# EAGLE board AVR-Burner (EAGLE 6.1)
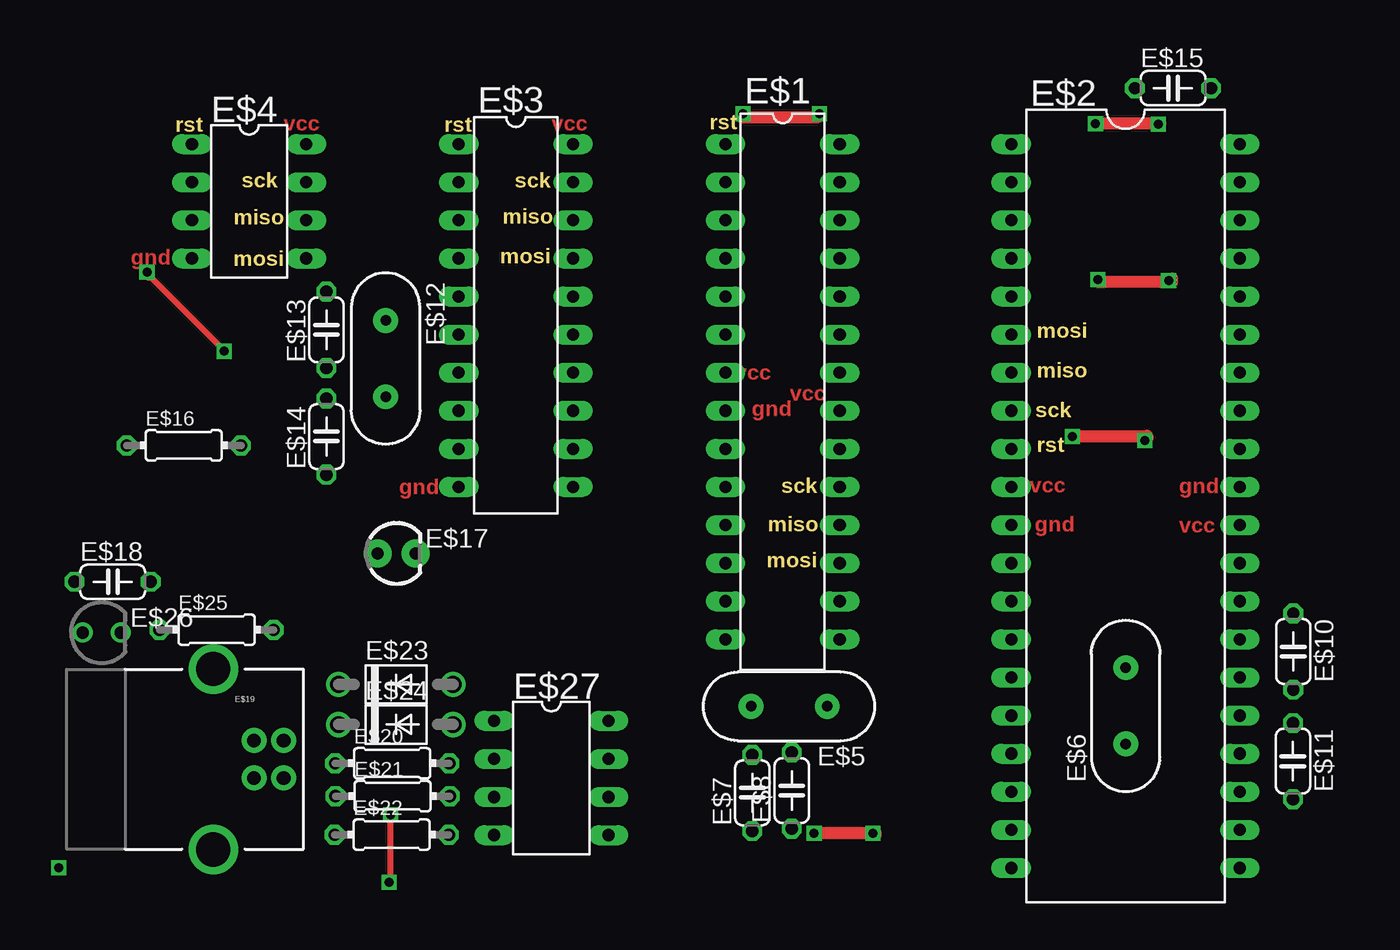
[diagram p0: board, top side]
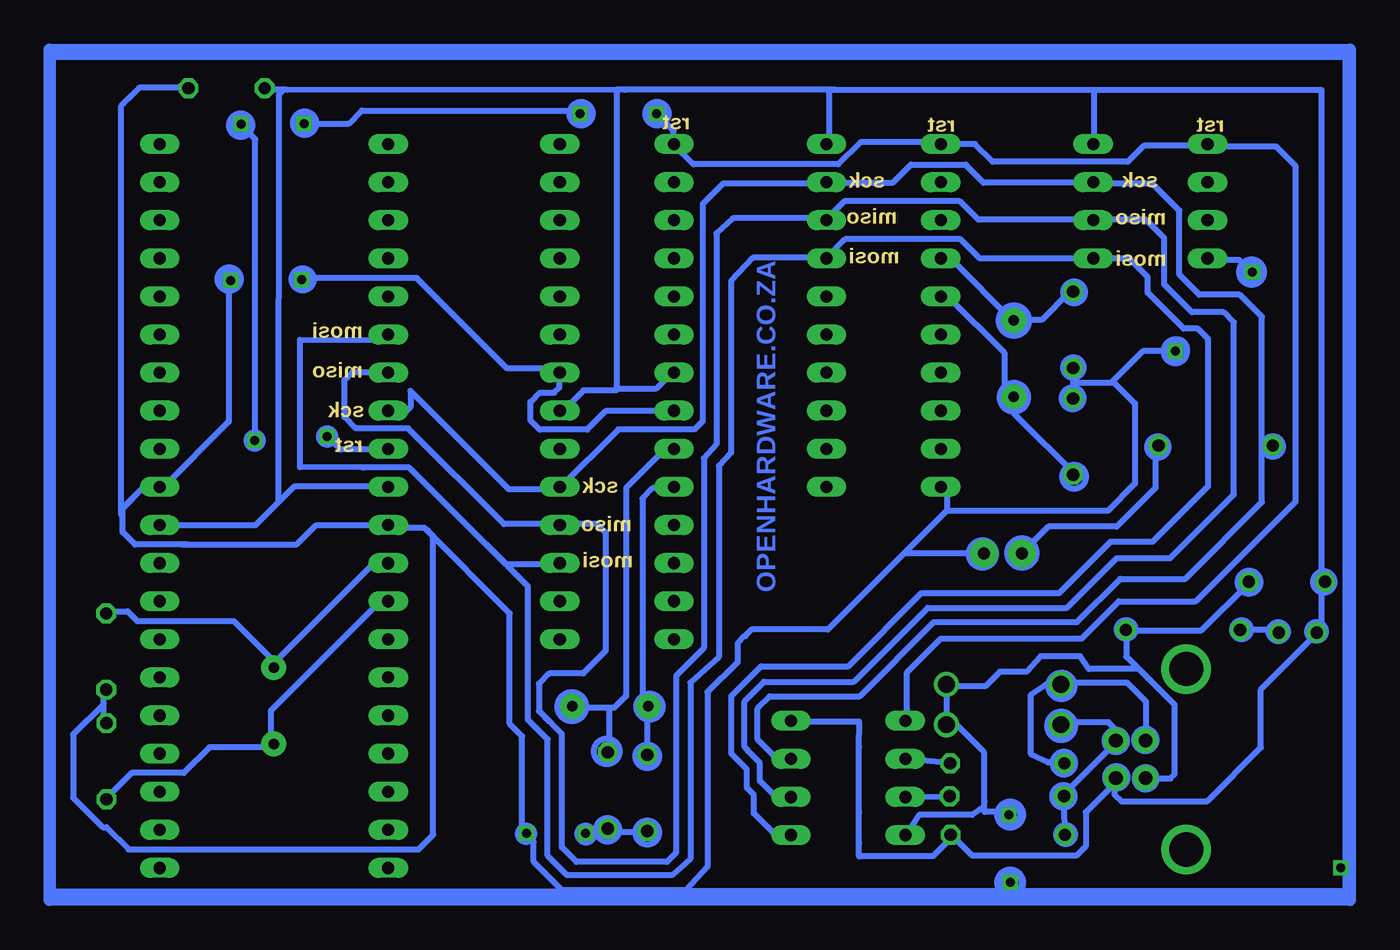
[diagram p1: board, bottom side, seen from below]

No outline drawn. Coordinates in mm, seen from the top.
Copper layers (1*16): Top 0.035mm / dielectric 1.5mm / Bottom 0.035mm
Design rules: minimum track width 10mil, minimum drill 24mil, track to track 8mil, track to pad 8mil, pad to pad 8mil, via to via 8mil, smd to smd 8mil, copper to edge 40mil, drill to drill 8mil, minimum pad ring 10mil, minimum via ring 8mil, stop-mask expansion 4mil, vias tented up to drill 0mil, thermal gap 10mil

## Footprints (pad centres in the part's own frame; a part is rotated, then mirrored left to right if it is on the bottom)
DIL28-3 = drill 0.813 long: 1 -16.51,-3.81; 2 -13.97,-3.81; 3 -11.43,-3.81; 4 -8.89,-3.81; 5 -6.35,-3.81; 6 -3.81,-3.81; 7 -1.27,-3.81; 8 1.27,-3.81; 9 3.81,-3.81; 10 6.35,-3.81; 11 8.89,-3.81; 12 11.43,-3.81; 13 13.97,-3.81; 14 16.51,-3.81; 15 16.51,3.81; 16 13.97,3.81; 17 11.43,3.81; 18 8.89,3.81; 19 6.35,3.81; 20 3.81,3.81; 21 1.27,3.81; 22 -1.27,3.81; 23 -3.81,3.81; 24 -6.35,3.81; 25 -8.89,3.81; 26 -11.43,3.81; 27 -13.97,3.81; 28 -16.51,3.81
DIL40 = drill 0.813 long: 1 -24.13,-7.62; 2 -21.59,-7.62; 3 -19.05,-7.62; 4 -16.51,-7.62; 5 -13.97,-7.62; 6 -11.43,-7.62; 7 -8.89,-7.62; 8 -6.35,-7.62; 9 -3.81,-7.62; 10 -1.27,-7.62; 11 1.27,-7.62; 12 3.81,-7.62; 13 6.35,-7.62; 14 8.89,-7.62; 15 11.43,-7.62; 16 13.97,-7.62; 17 16.51,-7.62; 18 19.05,-7.62; 19 21.59,-7.62; 20 24.13,-7.62; 21 24.13,7.62; 22 21.59,7.62; 23 19.05,7.62; 24 16.51,7.62; 25 13.97,7.62; 26 11.43,7.62; 27 8.89,7.62; 28 6.35,7.62; 29 3.81,7.62; 30 1.27,7.62; 31 -1.27,7.62; 32 -3.81,7.62; 33 -6.35,7.62; 34 -8.89,7.62; 35 -11.43,7.62; 36 -13.97,7.62; 37 -16.51,7.62; 38 -19.05,7.62; 39 -21.59,7.62; 40 -24.13,7.62
DIL20 = drill 0.813 long: 1 -11.43,-3.81; 2 -8.89,-3.81; 3 -6.35,-3.81; 4 -3.81,-3.81; 5 -1.27,-3.81; 6 1.27,-3.81; 7 3.81,-3.81; 8 6.35,-3.81; 9 8.89,-3.81; 10 11.43,-3.81; 11 11.43,3.81; 12 8.89,3.81; 13 6.35,3.81; 14 3.81,3.81; 15 1.27,3.81; 16 -1.27,3.81; 17 -3.81,3.81; 18 -6.35,3.81; 19 -8.89,3.81; 20 -11.43,3.81
DIL8 = drill 0.813 long: 1 -3.81,-3.81; 2 -1.27,-3.81; 3 1.27,-3.81; 4 3.81,-3.81; 5 3.81,3.81; 6 1.27,3.81; 7 -1.27,3.81; 8 -3.81,3.81
HC49US = drill 0.7 pad 1.651: 1 -2.54,0; 2 2.54,0
C050-024X044 = drill 0.813 octagon: 1 -2.54,0; 2 2.54,0
0204/7 = drill 0.813 octagon: 1 -3.81,0; 2 3.81,0
LED3MM = drill 0.813 pad 1.88: A -1.27,0; K 1.27,0
USB-B-PTH = drill 0.914 pad 1.676: D+ 0,1.25; D- 1.981,1.25; GND 0,-1.25; VBUS 1.981,-1.25 | drill 2.286: S1 -2.718,-6.02; S2 -2.718,6.02
DO41-7 = drill 1.118: A 3.81,0; C -3.81,0
LED3MM-NS = drill 0.813: A -1.27,0; K 1.27,0

## Placement (x,y rotation side)
E$1  [DIL28-3]  48.26,31.75 270 top
E$2  [DIL40]  71.12,24.13 270 top
E$3  [DIL20]  30.48,36.83 270 top
E$4  [DIL8]  12.7,44.45 270 top
E$5  [HC49US]  48.7,10.77 180 top
E$6  [HC49US]  71.13,10.81 90 top
E$7  [C050-024X044]  46.24,5 90 top
E$8  [C050-024X044]  48.87,5.16 90 top
E$10  [C050-024X044]  82.3,14.43 270 top
E$11  [C050-024X044]  82.28,7.12 270 top
E$12  [HC49US]  21.8,33.96 270 top
E$13  [C050-024X044]  17.85,35.88 90 top
E$14  [C050-024X044]  17.85,28.76 90 top
E$15  [C050-024X044]  74.28,51.99 0 top
E$16  2K2  [0204/7]  8.35,28.17 0 top
E$17  [LED3MM]  22.54,20.98 0 top
E$18  [C050-024X044]  3.6,19.08 0 top
E$19  [USB-B-PTH]  13.03,7.25 0 top
E$20  68RD+  [0204/7]  22.23,6.98 0 top
E$21  68Rd-  [0204/7]  22.27,4.79 0 top
E$22  2K2  [0204/7]  22.2,2.22 0 top
E$23  [DO41-7]  22.48,12.24 0 top
E$24  [DO41-7]  22.48,9.56 0 top
E$25  2K2  [0204/7]  10.53,15.88 0 top
E$26  [LED3MM-NS]  2.87,15.69 0 top
E$27  [DIL8]  32.84,6 270 top

## Library data of the parts
E$1-E$3 = atmel
E$4 E$27 = on-semiconductor
E$5 E$6 E$12 = SparkFun-FreqCtrl
E$7 E$8 E$10 E$11 E$13-E$16 E$18 E$20-E$22 E$25 = rcl
E$17 E$26 = SparkFun-LED
E$19 = SparkFun-Connectors
E$23 E$24 = ref-packages-longpad

## Tracks (layer width: path | path; a pad name or v marks a point on that pad's centre or on a via)
S$1
  Bottom 0.406: 34.4,45.63 41.18,45.63 42.55,44.26 42.55,29.78 43.1,29.23 48.16,29.23 52.08,25.32
S$2
  Bottom 0.406: 1.68,15.81 1.28,15.81 1.28,51.87 16.38,51.87 16.48,51.87 | 16.48,51.87 16.48,48.51 | 16.48,51.87 34.14,51.87 34.14,48.21
S$3
  Bottom 0.406: 28.92,10.64 28.92,13.04 26.66,15.3 17.27,15.3 14.8,17.77 9.67,17.77 3.02,24.43 3.02,46.8 4.32,48.1 9.05,48.1 9.25,48.31
S$4
  Bottom 0.406: 33.71,51.87 48.3,51.87 48.3,31.98 | 48.3,31.98 48.3,31.84 50.49,31.84 51.86,30.47 | 48.3,31.98 45.63,31.98 44.67,32.94
S$5
  Bottom 0.406: 63.54,25.43 69.78,25.43 72.36,22.85 78.61,22.85 78.71,22.75
S$6
  Bottom 0.406: 25.98,2.07 25.98,1.99 27.19,0.79 30.23,0.79 32.11,0.77 32.11,1.62 32.14,3.12
S$7
  Bottom 0.406: 47.75,51.88 70.49,51.86 70.8,51.54 70.84,24.38 72.12,23.1
S$8
  Bottom 0.406: 16.55,45.68 23.83,45.68 24.95,46.83
S$9
  Bottom 0.406: 16.55,43.21 24.16,43.21 25.4,44.45 33.1,44.45 34.39,43.16
S$10
  Bottom 0.406: 16.55,40.64 24.07,40.64 25.35,41.92 33.05,41.92 34.34,40.64
S$11
  Bottom 0.406: 44.35,30.45 49.01,30.45 50.25,29.22 53.4,29.22 54.02,29.83 54.02,31.07 53.4,31.68 52.44,31.68 52.1,32.03 52.1,33.06
S$12
  Bottom 0.406: 44.49,25.32 45.87,25.32 46.56,24.63 46.56,11.27 45.97,10.68
S$13
  Bottom 0.406: 44.59,27.89 45.08,27.89 47.65,25.32 47.65,11.47 48.44,10.68 51.3,10.68
S$14
  Bottom 0.406: 44.35,25.24 44.42,25.31
S$15
  Bottom 0.406: 52.2,25.24 55.45,25.24 62.02,31.81 62.02,30.73 62.3,30.44 63.56,30.44 63.62,30.5
S$16
  Bottom 0.406: 65.57,29.3 65.67,29.3 66.42,30.06 66.42,32.54 65.9,33.07 63.52,33.07 63.49,33.04
S$17  (via drill 0.6)
  Bottom 0.406: 63.95,27.88 66.69,27.88 v67.58,28.77
S$18
  Bottom 0.406: 63.63,20.26 64.51,20.26 71.13,13.64
S$19
  Bottom 0.406: 65.53,29.3 62.17,29.3 55.79,22.92 49.55,22.92 49,22.37 49,14.48 50.51,12.97 52.77,12.97 53.46,12.28 53.46,10.46 52.75,9.75
S$20
  Bottom 0.406: 52.02,20.24 55.65,20.24 62.1,26.69 65.19,26.69 69.39,26.73 69.39,35.19
S$21
  Bottom 0.406: 63.24,17.79 64.01,17.79 71.33,10.48 71.33,8.11 71.23,8.01
S$22
  Bottom 0.406: 63.63,22.83 68.36,22.83
S$23
  Bottom 0.406: 82.38,17.11 80.87,17.11 80.22,16.46 73.8,16.46 71.04,13.71
S$24
  Bottom 0.406: 71.28,8.04 75.42,8.04 77.13,6.33 80.6,6.33 82.36,4.57
S$25
  Bottom 0.406: 78.75,25.29 79.89,25.29 81.17,24.04
S$26
  Bottom 0.406: 76.82,21.56 80.37,21.56 81.2,22.4 81.2,23.98 79.86,25.33
S$27
  Bottom 0.406: 77.23,21.57 69.61,21.57 68.81,22.38
S$28
  Bottom 0.406: 36.75,7.17 37.49,7.17 38.89,8.57 38.89,10.63 38.06,11.45 32.07,11.45 27.13,16.39 17.6,16.39 14.72,19.28 10.37,19.28 5.26,24.38 5.26,36.74 6.74,38.22 9.45,38.22 10.77,39.54 10.77,43.83 12.58,45.64 16.52,45.64 16.61,45.56
S$29
  Bottom 0.406: 36.91,4.78 37.7,4.78 38.72,5.81 38.72,7 39.53,7.8 39.53,7.84 39.76,8.06 39.76,11.12 38.46,12.41 32.47,12.41 27.54,17.34 18.25,17.34 14.94,20.65 11.38,20.65 7.13,24.91 7.13,36.37 7.81,37.05 9.93,37.05 11.79,38.91 11.79,41.99 13.02,43.23 16.51,43.23 16.72,43.02
S$30
  Bottom 0.406: 36.73,2.26 37.75,2.26 39.13,3.64 39.13,4.87 39.6,5.35 39.6,6.59 40.63,7.62 40.63,11.46 38.65,13.45 32.83,13.45 27.96,18.32 18.78,18.32 15.35,21.75 12.54,21.75 8.84,25.46 8.84,35.27 9.52,35.95 10.48,35.95 12.88,38.36 12.88,39.39 14.12,40.62 16.93,40.62 16.99,40.55
S$31
  Bottom 0.406: 8.88,48.15 13.14,48.15 14.21,47.08 23.2,47.08 24.39,48.27 26.64,48.27 26.75,48.39 32.03,48.39 33.51,46.91 43.15,46.91 44.5,48.27
S$32
  Bottom 0.406: 34.37,45.7 29.86,45.7 28.66,46.9 25.03,46.9 24.26,46.12
S$33
  Bottom 0.406: 52.22,33.31 55.57,33.31 61.6,39.34 69.2,39.34 69.3,39.24
S$34
  Bottom 0.406: 56.87,21.45 57.35,21.92
S$35
  Bottom 0.406: 74.12,38.68 74.12,29.76 78.58,25.3
S$36
  Top 0.406: 36.82,7.23 37.64,7.23
S$37
  Bottom 0.406: 12.98,8.45 12.98,11.09 14.24,12.35 18.6,12.35 18.71,12.23
S$38
  Bottom 0.406: 15,8.45 15,9.21 15.5,9.71 18.48,9.71 18.64,9.56
S$39
  Bottom 0.406: 18.39,1.74 18.44,4.7 18.41,4.74 18.41,4.97 15,8.37
S$40
  Bottom 0.406: 18.6,7.03 19.51,7.03 20.67,7.59 20.67,11.57 19.67,12.23 18.86,12.23 18.79,12.16
S$41
  Bottom 0.406: 15.03,6.06
S$42
  Bottom 0.406: 12.96,5.97 11.36,5.97 11.08,6.25 11.08,10.88 13.47,13.27 16.8,13.27 17.38,14.12 20.01,14.12 20.94,13.09 22.73,13.09 23.7,12.12 26.18,12.12
S$43
  Bottom 0.406: 15.09,5.83 15.09,4.89 14.65,4.45 8.92,4.45 5.34,8.03 5.34,11.89 1.54,15.69
S$44
  Bottom 0.406: 4.24,15.86 6.44,15.86 6.77,15.53
S$45
  Bottom 0.406: 14.31,15.86 14.31,14.09 12.88,12.66
S$46
  Bottom 1.016: 1.51,15.89 1.65,15.89 1.73,15.81
S$47
  Bottom 1.016: 4.13,15.6 4.13,15.64 4.17,15.69
S$48
  Bottom 1.016: 6.71,15.92 6.71,15.9
S$49
  Bottom 1.016: 14.28,16.01 14.28,15.92 14.31,15.89
S$50
  Bottom 0.406: 14.83,5.85 14.88,5.85 17,3.72 17,1.45 17.64,0.82 24.58,0.82 26.07,2.31
S$51  (via drill 0.6)
  other vias: 69.27,39.24
S$52
  Bottom 0.406: 26.31,12.02 26.31,9.58 26.2,9.47
S$53
  Bottom 0.406: 26.09,4.73 27.89,4.72 29.24,4.73 29.19,4.75 28.06,4.75
S$54
  Bottom 0.406: 25.91,6.97 26.07,6.97 28.58,7.24 29.12,7.24 28.92,7.27
S$55  (via drill 0.6)
  other vias: 73.99,39.16
S$56
  Bottom 0.406: 69.17,22 68.34,22.83
S$57
  Bottom 0.406: 82.46,9.52 82.46,11.66 82.41,12.13
S$58
  Bottom 0.406: 51.31,10.52 51.35,10.52
S$59
  Bottom 0.406: 46.21,7.74 46.21,10.7 46.3,10.79
S$60
  Bottom 0.406: 48.76,7.41 48.76,10.54 48.93,10.7
S$61
  Bottom 0.406: 46.05,2.39 48.68,2.39 48.93,2.63
S$62
  Bottom 0.406: 34.45,43.31 40.53,43.31 41.62,42.31 41.62,28.25 42.47,27.31 42.47,14.66 44.32,12.81 44.32,1.03 44.94,0.41 50.96,0.41 51.92,1.37 51.92,8.92 53.36,10.36
S$63
  Bottom 0.406: 34.32,40.69 39.18,40.69 40.64,39.13 40.64,27.68 41.47,26.81 41.47,14.08 43.36,12.37 43.36,0.62 44.59,-0.48 51.58,-0.48 52.88,0.82 52.88,8.58 54.18,9.88 54.18,18.77 56.92,21.54
S$64
  Bottom 0.406: 69.39,35.2 63.67,35.22 63.52,35.55
S$65  (via drill 0.6)
  other vias: 72.41,28.5
S$66  (via drill 0.6)
  other vias: 45.62,50.3
S$67  (via drill 0.6)
  other vias: 50.71,50.3
S$68  (via drill 0.6)
  other vias: 69.12,49.63
S$69  (via drill 0.6)
  other vias: 73.31,49.59
S$70
  Bottom 0.406: 72.36,28.41 72.36,48.59 73.36,49.59
S$71
  Bottom 0.406: 69.17,49.63 66.12,49.63 65.27,50.49 50.9,50.49 50.66,50.25
S$72
  Bottom 0.406: 44.48,48.2 44.48,49.16 45.72,50.39
S$73
  Bottom 0.406: 26.64,40.45 25.82,40.45 21.95,36.58 19.9,36.58 18.09,38.39
S$74
  Bottom 0.406: 26.64,38.14 26.23,38.14 22.44,34.35 22.44,32.04 21.79,31.39 21.79,30.31 17.51,26.03
S$75
  Bottom 0.406: 17.84,31.06 17.84,33.28 17.76,33.36
S$76
  Bottom 0.406: 17.76,32.38 15.13,32.38 13.73,30.98 13.73,25.62 15.54,23.81 26.29,23.81 34.2,15.9 39.3,15.9 39.71,15.49
S$77
  Bottom 0.406: 48.93,2.61 50.09,2.61 50.5,2.2
S$78  (via drill 0.6)
  other vias: 50.36,2.3
S$79  (via drill 0.6)
  other vias: 54.29,2.3
S$80
  Bottom 0.406: 54.58,2.37 54.58,8.78 55.41,9.61 55.41,16.98 61.09,22.67 63.22,22.67 63.45,22.91
S$81
  Bottom 0.406: 39.67,15.47 39.77,15.47 40.21,14.97 40.22,13.71 42.23,11.73 42.23,0.07 43.67,-1.48 51.9,-1.48 53.8,0.43 53.8,1.71 54.37,2.28
S$82
  Bottom 0.406: 82.45,10.95 84.5,8.89 84.5,4.69 82.53,2.72 82.29,2.72 80.81,1.24 61.49,1.24 60.5,2.22 60.5,22.13 60.88,22.51
S$83
  Bottom 0.406: 81.29,23.53 81.29,50.81 80.4,51.7
S$84
  Bottom 0.406: 70.22,51.87 71.8,51.87
S$85
  Bottom 0.406: 26.27,12.11 26.35,12.12
S$86
  Bottom 0.406: 28.93,9.77 28.93,10.96
S$87
  Bottom 0.406: 76.73,52.01 80.12,52.01 81.15,50.98
S$88
  Bottom 0.406: 47.55,-1.58 85.83,-1.58 85.83,54.08 -0.3,54.08 -0.3,-0.69
S$89
  Bottom 0.406: 48.37,-1.51 -0.33,-1.51 -0.33,7.33
S$90
  Bottom 0.813: -0.35,54.2 -0.59,54.2 -0.59,-2.13 86.07,-2.13 86.07,54.55 -0.59,54.55 -0.59,48.81
S$91
  Top 0.813: 50.4,2.34 54.45,2.34 54.45,2.23
S$92
  Top 0.813: 45.5,50.06 50.63,50.06 50.63,50.13
S$93
  Top 0.813: 69.07,49.65 73.45,49.65
S$94
  Top 0.813: 69.27,39.09 74.21,39.09 74.21,39.3
S$95
  Top 0.813: 67.49,28.8 72.56,28.8 72.56,28.6
S$96
  Bottom 0.406: 26.77,25.36 26.27,25.36 26.27,23.78
S$97  (via drill 0.6)
  Bottom 0.406: v11.03,34.45 13.22,34.45 15.21,32.46
S$98  (via drill 0.6)
  other vias: 5.89,39.73
S$99
  Bottom 0.406: 8.9,40.55 6.78,40.55 5.89,39.66
S$100
  Bottom 0.406: 26.25,9.47 25.55,9.47 23.8,7.73 23.8,4.08 24.57,3.54 28.13,3.54 29,2.21
S$101
  Bottom 0.406: 32.12,1.7 32.12,3.68 32.12,8.04 32.1,9.74 36.51,9.72 36.79,9.6
S$102  (via drill 0.6)
  other vias: 0,0
S$103
  Top 0.406: 6,39.35 6.18,39.35 | 6.18,39.35 11.13,34.4 6.18,39.35
S$104
  Bottom 0.406: 12.36,27.79 12.36,25.34 14.94,22.76 19.49,22.76 21.41,20.84
S$105
  Bottom 0.406: 23.86,20.98 29.11,20.98 31.25,18.84
S$106
  Bottom 0.406: 14.22,15.84 9.29,15.84 6.16,18.98
S$107  (via drill 0.6)
  other vias: 22.13,3.56
S$108  (via drill 0.6)
  other vias: 22.03,-0.96
S$109
  Bottom 0.406: 22.66,3.73 23.76,3.73 23.76,4.44
S$110
  Top 0.406: 22.01,-1.04 22.12,-1.04 22.12,3.57
(copper drawn outside any net)
  shapes: Bottom circle x61

## Text on the board
Top: vcc | vcc | gnd | vcc | vcc | gnd | gnd | vcc | gnd | gnd | vcc
Bottom: OPENHARDWARE.CO.ZA
Dimension: rst | rst | rst | sck | sck | miso | miso | mosi | mosi | mosi | miso | sck | rst | sck | miso | mosi